# Allegro board AVRUSB500_0729.brd
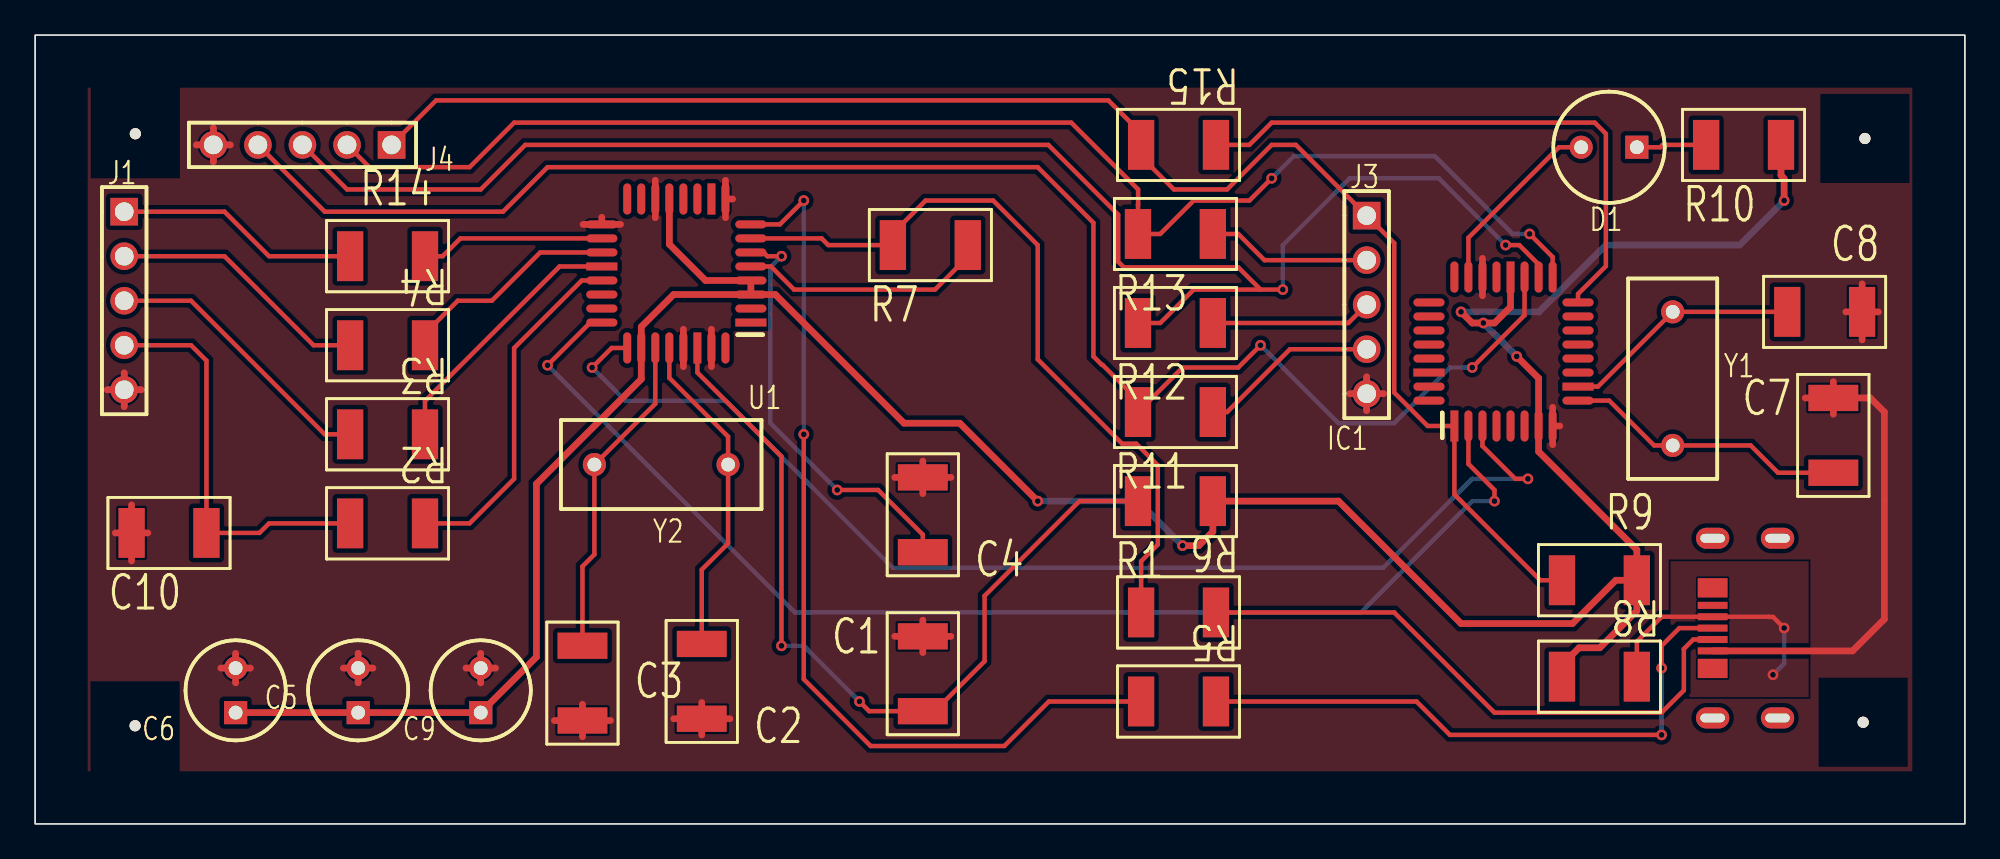
[diagram p0: board, top side]
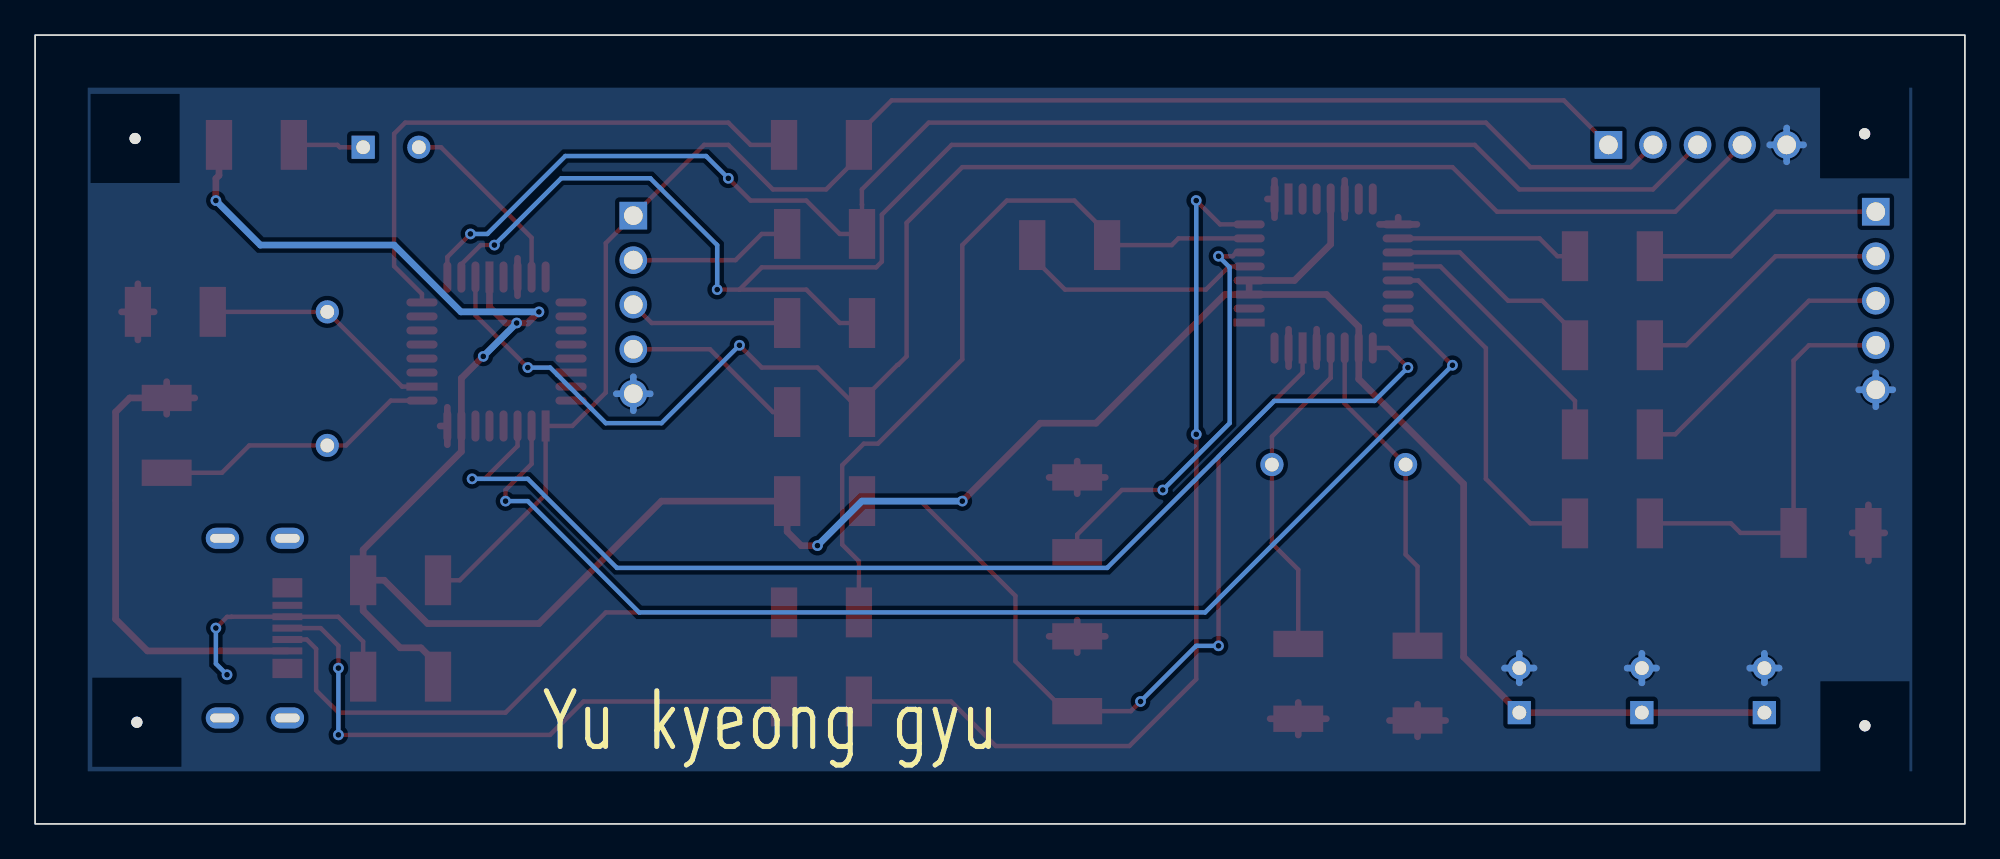
[diagram p1: board, bottom side, seen from below]

Outline 110 x 45 mm; copper layers: TOP, BOTTOM. Coordinates in mm from the lower left corner of the outline.
Outline path: rectangle 0,0 110,45

## Design rules (mm)
constraint set DEFAULT: min track width 0.254
net group POWERNETS: nets VCC

## Placement (name value [footprint] x y rotation side)
C1  47nF  [CPCYL1D225LS100031]  50.6 10.7 270 top
C2  27pF  [CPCYL1D225LS100031]  38 6 90 top
C3  27pF  [CPCYL1D225LS100031]  31.2 5.9 90 top
C4  47nF  [CPCYL1D225LS100031]  50.6 15.5 90 top
C5  100nF  [CPCYL1D225LS100031#2]  18.41 6.35 90 top
C6  1uF  [CPCYL1D225LS100031#2]  11.43 6.35 90 top
C7  100nF  [CPCYL1D225LS100031]  102.5 24.3 270 top
C8  100nF  [CPCYL1D225LS100031]  104.14 29.21 180 top
C9  100nF  [CPCYL1D225LS100031#2]  25.4 6.35 90 top
C10  22nF  [CPCYL1D225LS100031]  5.5 16.6 0 top
D1  LED  [CYLD250LS125031]  91.3 38.6 180 top
IC1  ATmega8  [QUAD80M32WG900]  80.9 22.7 0 top
J1  bbpg_Bitbang  [BLKCON100VHTM1SQSW1005]  5.08 34.92 270 top
J2  USBA  [MICRO_USB]  99.32 11.17 90 top
J3  avrusb500_out  [BLKCON100VHTM1SQSW1005]  75.9 34.7 270 top
J4  firmware_in  [BLKCON100VHTM1SQSW1005]  20.32 38.73 180 top
NOREF  -  [unnamed]  5.71 39.37 0 top
NOREF#2  -  [unnamed]  104.2 5.8 0 top
NOREF#3  -  [unnamed]  104.3 39.1 0 top
NOREF#4  -  [#2]  0 45 0 top
NOREF#5  -  [unnamed]  5.7 5.6 0 top
NOREF#6  -  [#2]  110 0 90 top
R1  470  [AX400X100031]  62.87 18.41 0 top
R2  220  [AX400X100031]  22.22 17.14 180 top
R3  220  [AX400X100031]  22.22 22.22 180 top
R4  220  [AX400X100031]  22.22 27.31 180 top
R5  27  [AX400X100031]  67.31 6.98 180 top
R6  27  [AX400X100031]  67.31 12.06 180 top
R7  1.5k  [AX400X100031]  48.89 33.02 0 top
R8  2.2  [AX400X100031]  91.3 8.4 180 top
R9  10k  [AX400X100031]  91.3 13.9 180 top
R10  470  [AX400X100031]  95.25 38.73 0 top
R11  1k  [AX400X100031]  62.87 23.5 0 top
R12  220  [AX400X100031]  62.87 28.57 0 top
R13  1k  [AX400X100031]  62.87 33.66 0 top
R14  220  [AX400X100031]  22.22 32.38 180 top
R15  220  [AX400X100031]  67.31 38.73 180 top
U1  FT232BM  [QUAD80M32WG900]  40.8 28.6 90 top
Y1  3.6864Mhz  [RAD450X200LS300031]  93.34 29.21 270 top
Y2  6Mhz  [RAD450X200LS300031]  39.5 20.5 180 top

## Library data of the parts
C1-C4 C7 C8 C10 = CAPACITOR NON-POL: alternate symbols: (SML2015)
C5 C9 = CAPACITOR NON-POL: alternate symbols: (SMDCAP)
C6 = CAPACITOR POL: alternate symbols: (SMDCAP)
D1 = LED
IC1 = ATmega8-DIL28_1
J1 J3 J4 = CON5
J2 = CON4_7
R1-R15 = R: alternate symbols: (SML2015)
U1 = FT232BM_2: alternate symbols: (JEDECMS026)
Y1 Y2 = ZTA

## Footprints (pads in the part's own frame, mm; a bottom-side part is the same pattern mirrored in y, then rotated)
AX400X100031
  rect 1.499x2.845 smd: 1(0,0) 2(4.267,0)
BLKCON100VHTM1SQSW1005
  rect 1.575x1.575 hole 1.067: 1(0,0)
  round 1.575 hole 1.067: 2(2.54,0) 3(5.08,0) 4(7.62,0) 5(10.16,0)
CPCYL1D225LS100031
  rect 1.499x2.845 smd: 1(0,0) 2(4.267,0)
CPCYL1D225LS100031#2
  rect 1.321x1.321 hole 0.787: 1(0,0)
  round 1.321 hole 0.787: 2(2.54,0)
CYLD250LS125031
  rect 1.321x1.321 hole 0.787: 1(0,0)
  round 1.321 hole 0.787: 2(3.175,0)
MICRO_USB
  oval 1.2x1.9 hole 0.5x1.4: (-5.125,3.7) (-5.125,0) (5.125,3.7) (5.125,0)
  rect 1.1x1.7 smd: (-2.3,3.7) (2.3,3.7)
  rect 0.4x1.7 smd: 1(-1.3,3.7) 2(-0.65,3.7) 3(0,3.7) 4(0.65,3.7) 5(1.3,3.7)
QUAD80M32WG900
  rect 0.457x1.778 smd: 1(0,0) 20(3.2,8.496)
  oval 0.457x1.778 smd: 2(0.8,0) 3(1.6,0) 4(2.4,0) 5(3.2,0) 6(4,0) 7(4.801,0) 8(5.601,0) 17(5.601,8.496) 18(4.801,8.496) 19(4,8.496) 21(2.4,8.496) 22(1.6,8.496) 23(0.8,8.496) 24(0,8.496)
  oval 1.778x0.457 smd: 9(7.048,1.448) 11(7.048,3.048) 12(7.048,3.848) 13(7.048,4.648) 14(7.048,5.448) 15(7.048,6.248) 16(7.048,7.048) 25(-1.448,7.048) 26(-1.448,6.248) 27(-1.448,5.448) 28(-1.448,4.648) 29(-1.448,3.848) 31(-1.448,2.248) 32(-1.448,1.448)
  rect 1.778x0.457 smd: 10(7.048,2.248) 30(-1.448,3.048)
RAD450X200LS300031
  round 1.321 hole 0.787: 1(0,0) 2(7.62,0)
unnamed
  round 0.635 hole 3.175 unplated: (0,0)

## Nets
+5V: J2.4 R8.1
GND: C1.1 C2.1 C3.1 C4.2 C5.2 C6.2 C7.1 C8.1 C9.2 C10.1 IC1.8 IC1.22 J1.5 J2.1 J3.5 J4.5 U1.9 U1.14 U1.17 U1.29 U1.31
VCC: C5.1 C6.1 C9.1 IC1.7(VCC) IC1.20 R1.2 R8.2 R9.1 R10.2 U1.3 U1.4 U1.13 U1.26
BMISO: J1.3 R3.2
BMOSI: J1.2 R4.2
BRESET: J1.1 R14.2
BSCK: C10.2 J1.4 R2.2
D+: J2.2 R6.1
D-: J2.3 R5.1
F_MISO: IC1.18 J4.3 R12.1
F_MOSI: IC1.17 J4.2 R13.1
F_SCK: IC1.19 J4.4 R11.1
MISO: J3.3 R12.2
MOSI: J3.2 R13.2
RESET: IC1.1 J3.1 J4.1 R9.2 R15.2
RXD: IC1.2 U1.24
SCK: J3.4 R11.2
TXD: IC1.3 U1.25
N02483: R6.2 R7.1 U1.7
N02615: R5.2 U1.8
N03527: C4.1 U1.6
N06839: R2.1 U1.21
N06967: R3.1 U1.20
N07033: R4.1 U1.19
N07247: R14.1 U1.18
N11951: R7.2 U1.5
N41098: C3.2 U1.27 Y2.2
N41106: C2.2 U1.28(XTOUT) Y2.1
N49165: C1.2 R1.1 U1.30
N100346: D1.2(CATHODE) IC1.23
N100350: D1.1 R10.1
N100362: C7.2 IC1.9 Y1.2
N100498: C8.2 IC1.10 Y1.1
N100640: IC1.16 R15.1

Pads without a net: IC1 4 5 6 11 12 13 14 15 21 24 25 26 27 28 29 30 31 32; J2 5; U1 1 2 10 11 12 15 16 22 23 32

## Via types
v1: diameter 0.61, hole 0.33, TOP to BOTTOM, 26 vias

## Routing (per net, layer and track width the routed paths; a pad name or vN(x,y) marks a point on that pad's centre or on a via; arc(x,y) is an arc through that point)
+5V: length 14.2
  TOP w0.254: v1(99.69,11.18) 99.06,11.81 98.81,11.81 98.8,11.82 J2.4 92.72,11.82 91.3,10.4 R8.1
  BOTTOM w0.254: v1(99.06,8.51) 99.69,9.14 v1(99.69,11.18)
GND: length 118.8
  TOP w0.381: J3.5 75.9,25.51 ; J3.5 74.93,24.54 ; J3.5 76.87,24.54 ; J3.5 75.9,23.57 ; C9.2 25.4,9.73 ; C9.2 25.4,8.05 ; C9.2 24.56,8.89 ; C9.2 26.24,8.89 ; 38.55,28.22 U1.31 38.55,26.09 ; C5.2 19.25,8.89 ; C5.2 17.58,8.89 ; C5.2 18.41,9.73 ; C5.2 18.41,8.05 ; 9.19,38.73 J4.5 ; J4.5 11.13,38.73 ; J4.5 10.16,37.77 ; J4.5 10.16,39.7 ; 82.5,32.26 IC1.22 82.5,30.13 ; 38,5.07 C2.1 ; C2.1 39.6,6 ; C2.1 36.4,6 ; C2.1 38,6.93 ; C7.1 102.5,25.23 ; C7.1 102.5,23.37 ; C7.1 100.9,24.3 ; C7.1 104.61,24.3 105.41,23.5 105.41,18.49 ; J2.1 103.6,9.87 105.41,11.68 105.41,18.41 ; C6.2 11.43,9.73 ; C6.2 10.59,8.89 ; C6.2 11.43,8.05 ; C6.2 12.27,8.89 ; IC1.8 86.5,23.77 ; IC1.8 86.5,21.63 ; IC1.8 86.91,22.7 ; 39.35,34.58 U1.9 ; U1.9 39.35,36.72 ; U1.9 39.76,35.65 ; 4.11,24.76 J1.5 ; J1.5 6.05,24.76 ; J1.5 5.08,23.8 ; J1.5 5.08,25.73 ; C4.2 50.6,20.69 ; C4.2 49,19.77 ; C4.2 52.2,19.77 ; C4.2 50.6,18.84 ; C3.1 32.8,5.9 ; C3.1 29.6,5.9 ; C3.1 31.2,6.83 ; C3.1 31.2,4.97 ; C8.1 104.14,30.81 ; C8.1 103.21,29.21 ; C8.1 105.07,29.21 ; C8.1 104.14,27.61 ; 36.95,28.22 U1.29 36.95,26.09 ; C1.1 50.6,11.63 ; C1.1 49,10.7 ; C1.1 50.6,9.77 ; C1.1 52.2,10.7 ; C10.1 5.5,18.2 ; C10.1 5.5,15 ; C10.1 6.43,16.6 ; C10.1 4.57,16.6 ; U1.17 32.3,34.61 ; U1.17 31.24,34.2 ; U1.17 33.37,34.2 ; 35.35,36.72 U1.14 35.35,34.58
  BOTTOM w0.381: 10.59,8.89 C6.2 ; C6.2 12.27,8.89 ; C6.2 11.43,9.73 ; C6.2 11.43,8.05 ; C9.2 26.24,8.89 ; C9.2 25.4,9.73 ; C9.2 24.56,8.89 ; C9.2 25.4,8.05 ; 74.93,24.54 J3.5 ; J3.5 75.9,25.51 ; J3.5 76.87,24.54 ; J3.5 75.9,23.57 ; J4.5 11.13,38.73 ; J4.5 9.19,38.73 ; J4.5 10.16,37.77 ; J4.5 10.16,39.7 ; C5.2 18.41,9.73 ; C5.2 18.41,8.05 ; C5.2 17.58,8.89 ; C5.2 19.25,8.89 ; J1.5 5.08,25.73 ; J1.5 4.11,24.76 ; J1.5 5.08,23.8 ; J1.5 6.05,24.76
VCC: length 173.8
  TOP w0.381: C6.1 C5.1 C9.1 28.57,9.53 28.57,19.4 34.55,25.37 U1.26 34.55,28.36 36.39,30.2 U1.3 ; v1(99.69,35.56) 99.69,36.82 99.52,37 R10.2 ; U1.3 42.19,30.2 49.53,22.86 52.7,22.86 v1(57.15,18.41) ; U1.3 U1.4 38.21,31 36.15,33.06 U1.13 ; R9.1 90.1,13.9 87.63,11.43 81.28,11.43 74.3,18.41 R1.2 67.13,16.67 66.33,15.88 v1(65.4,15.88) ; R9.1 91.3,15.64 85.7,21.24 IC1.7 85.7,25.42 v1(84.45,26.67) ; R9.1 91.3,12.16 89.19,10.05 88.01,10.05 87.03,9.07 R8.2 ; IC1.20 84.1,29.49 83.19,28.57 v1(82.55,28.57) 81.91,28.57 v1(81.28,29.21)
  BOTTOM w0.381: v1(84.45,26.67) v1(82.55,28.57) ; v1(57.15,18.41) 62.87,18.41 v1(65.4,15.88) ; v1(99.69,35.56) 97.15,33.02 89.53,33.02 85.72,29.21 v1(81.28,29.21)
BMISO: length 16
  TOP w0.254: R3.2 16.51,22.22 8.89,29.84 J1.3
BMOSI: length 15
  TOP w0.254: R4.2 15.88,27.31 10.8,32.38 J1.2
BRESET: length 13.9
  TOP w0.254: J1.1 10.8,34.92 13.33,32.38 R14.2
BSCK: length 23.3
  TOP w0.254: R2.2 13.33,17.14 12.79,16.6 C10.2 9.77,26.43 8.89,27.31 J1.4
D+: length 33.8
  TOP w0.254: J2.2 94.52,10.52 93.98,9.98 93.98,7.62 92.71,6.35 83.19,6.35 77.47,12.06 R6.1
D-: length 34.6
  TOP w0.254: R5.1 78.74,6.98 80.64,5.08 v1(92.71,5.08) ; v1(92.71,8.89) 92.71,10.16 93.72,11.17 J2.3
  BOTTOM w0.254: v1(92.71,8.89) v1(92.71,5.08)
F_MISO: length 92.2
  TOP w0.254: v1(71.12,30.48) 69.85,30.48 ; 69.85,30.48 66.04,30.48 64.13,28.57 R12.1 ; 69.85,30.48 68.58,31.75 62.06,31.75 61.73,32.07 61.73,34.75 57.75,38.73 27.94,38.73 25.4,36.19 17.78,36.19 J4.3 ; v1(83.82,33.02) 84.6,33.02 85.7,31.92 IC1.18
  BOTTOM w0.254: v1(83.82,33.02) 80.01,36.83 74.93,36.83 71.12,33.02 v1(71.12,30.48)
F_MOSI: length 79.8
  TOP w0.254: J4.2 19.05,37.47 24.76,37.47 27.31,40 59.06,40 62.87,36.19 62.87,35.34 62.87,35.33 R13.1 64.13,33.66 66.04,35.56 69.21,35.56 v1(70.49,36.83) ; IC1.17 86.5,32.34 v1(85.19,33.66)
  BOTTOM w0.254: v1(85.19,33.66) 84.22,33.66 79.77,38.1 71.75,38.1 v1(70.49,36.83)
F_SCK: length 93.3
  TOP w0.254: v1(81.91,26.03) 84.9,29.02 IC1.19 ; v1(69.85,27.31) 68.58,26.03 65.4,26.03 63.54,24.17 62.87,24.17 ; R11.1 62.87,24.17 ; 62.87,24.17 60.85,26.19 60.81,26.19 60.32,26.67 60.32,34.29 57.15,37.47 29.21,37.47 26.67,34.92 16.51,34.92 J4.4
  BOTTOM w0.254: v1(81.91,26.03) 80.64,26.03 77.47,22.86 74.3,22.86 v1(69.85,27.31)
MISO: length 9.2
  TOP w0.254: R12.2 74.85,28.57 J3.3
MOSI: length 9.4
  TOP w0.254: R13.2 68.58,33.66 70.07,32.16 J3.2
RESET: length 89.3
  TOP w0.254: R9.2 85.8,13.9 80.9,18.8 IC1.1 79.38,22.7 77.47,24.61 77.47,33.13 J3.1 71.87,38.73 70.49,38.73 67.94,36.19 64.91,36.19 63.04,38.06 R15.2 63.04,39.41 61.18,41.28 22.86,41.28 J4.1
RXD: length 71.4
  TOP w0.254: v1(29.21,26.17) 31.64,28.6 U1.24 ; IC1.2 81.7,20.53 83.19,19.05 v1(83.19,18.41)
  BOTTOM w0.254: v1(29.21,26.17) 43.31,12.06 75.56,12.06 81.91,18.41 v1(83.19,18.41)
SCK: length 10.3
  TOP w0.254: R11.2 67.94,23.5 71.53,27.08 J3.4
TXD: length 67.2
  TOP w0.254: U1.25 32.87,27.15 v1(31.75,26.03) ; v1(85.09,19.69) 84.37,19.69 82.5,21.56 IC1.3
  BOTTOM w0.254: v1(85.09,19.69) 81.91,19.69 76.83,14.6 48.89,14.6 39.37,24.13 33.65,24.13 v1(31.75,26.03)
N02483: length 43.7
  TOP w0.254: U1.7 44.83,33.4 45.21,33.02 R7.1 48.89,33.69 50.76,35.56 54.61,35.56 57.15,33.02 57.15,26.5 61.96,21.69 62.76,21.69 64,20.46 64,15.94 63.04,14.98 R6.2
N02615: length 52.7
  TOP w0.254: v1(43.81,22.22) 43.81,8.25 47.62,4.44 55.25,4.44 57.78,6.98 R5.2 ; v1(43.81,35.56) 42.46,34.2 U1.8
  BOTTOM w0.254: v1(43.81,22.22) v1(43.81,35.56)
N03527: length 23.9
  TOP w0.254: v1(45.72,19.05) 48.05,19.05 50.6,16.5 C4.1 ; U1.6 41.52,32.6 41.74,32.38 v1(42.55,32.38)
  BOTTOM w0.254: v1(45.72,19.05) 41.91,22.86 41.91,31.75 v1(42.55,32.38)
N06839: length 20.2
  TOP w0.254: R2.1 24.76,17.14 27.31,19.69 27.31,27.14 31.16,31 U1.21
N06967: length 15.2
  TOP w0.254: U1.20 29.89,31.8 22.22,24.13 R3.1
N07033: length 12.7
  TOP w0.254: R4.1 22.22,27.98 24.09,29.84 26.03,29.84 28.79,32.6 U1.19
N07247: length 10.5
  TOP w0.254: U1.18 24.24,33.4 23.23,32.38 R14.1
N11951: length 14.4
  TOP w0.254: U1.5 41.94,31.8 43.26,30.48 51.3,30.48 53.16,32.35 R7.2
N41098: length 18.7
  TOP w0.254: C3.2 31.2,14.69 31.88,15.37 Y2.2 35.35,23.97 U1.27
N41106: length 18.9
  TOP w0.254: U1.28 36.15,25.44 39.5,22.09 Y2.1 39.5,16 38,14.5 C2.2
N49165: length 48
  TOP w0.254: v1(42.55,10.16) 42.55,20.95 37.75,25.75 U1.30 ; R1.1 59.53,18.41 54.12,13.01 54.12,9.28 51.27,6.43 C1.2 47.54,6.43 v1(46.99,6.98)
  BOTTOM w0.254: v1(42.55,10.16) 43.81,10.16 v1(46.99,6.98)
N100346: length 10.8
  TOP w0.254: D1.2 86.86,38.6 81.7,33.44 IC1.23
N100350: length 4
  TOP w0.254: R10.1 92.77,38.73 92.63,38.6 D1.1
N100362: length 16.3
  TOP w0.254: IC1.9 89.73,24.15 92.28,21.59 Y1.2 97.79,21.59 99.35,20.03 C7.2
N100498: length 13.7
  TOP w0.254: C8.2 Y1.1 89.08,24.95 IC1.10
N100640: length 33.3
  TOP w0.254: R15.1 69.21,38.73 70.49,40 88.9,40 89.53,39.37 89.53,31.82 87.95,30.23 IC1.16

## Copper pours and planes (outline as drawn; the poured copper is in the pictures)
+5V on TOP: 93.22,14.99 93.22,7.24 101.09,7.24 101.09,14.99 ; 1 cut-out
GND on TOP: 3,3 3,42 107,42 107,3 ; 10 cut-outs
GND on BOTTOM: 3,3 3,42 107,42 107,3

## Text on the board
Ref Des/Silkscreen Bottom: Yu kyeong gyu
NCLEGEND-1-2: FIGURE | SIZE | 0.3299 | 0.7869 | 1.0671 | 1.4x0.5001 | DRILL CHART: TOP to BOTTOM | ALL UNITS ARE IN MILLIMETERS | PLATED | QTY | 45 | 56 | 15 | 4
